# Altium PCB PCB1.PcbDoc
Units mm, origin at the board's own origin, x right, y up, seen from the top; angles counter-clockwise.
Board outline 55.42 x 15.98 mm, 2 copper layers (Top Layer, Bottom Layer), stack 0.6 mm thick; 38 components, 19 nets, 109 pads, 20 vias.
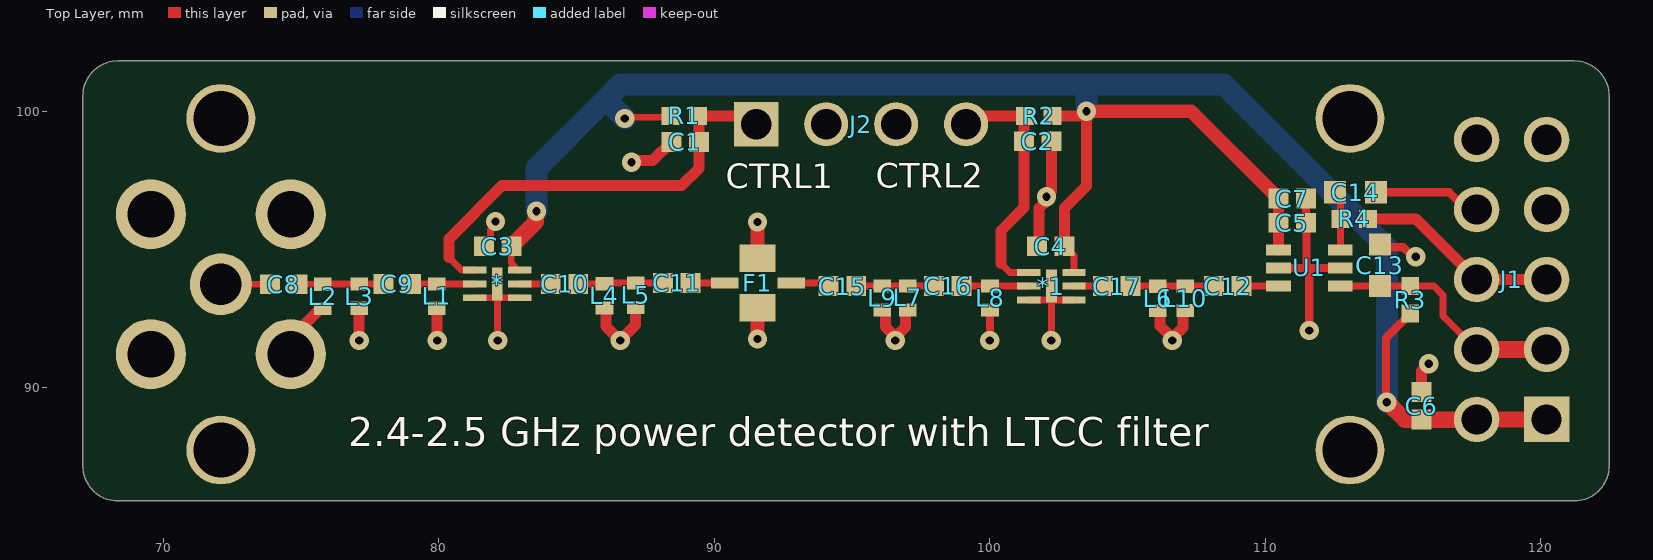
[diagram p0: Top Layer view]
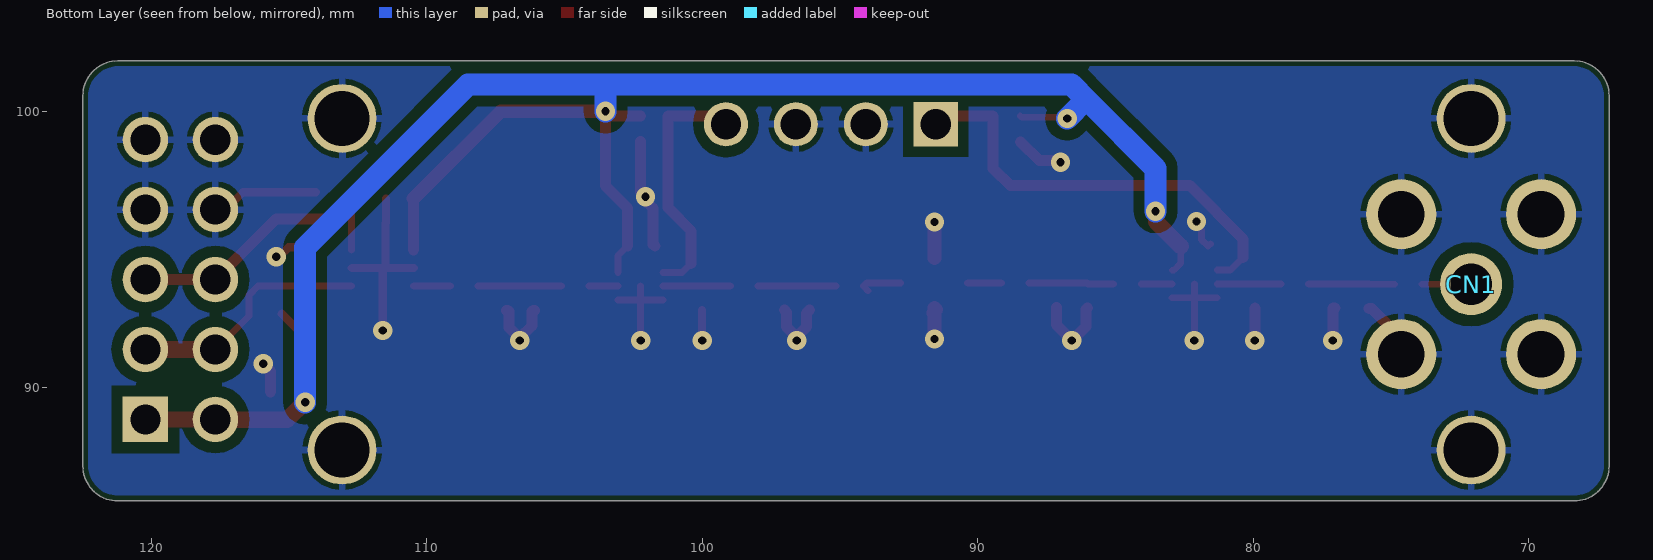
[diagram p1: Bottom Layer view, seen from below]

## Layer stack, top to bottom
Top Solder: solder mask 0.025, SM-001, Dk 4
Top Layer: signal copper 0.035
Dielectric 1: core 0.53, Core-043, Dk 4.3
Bottom Layer: signal copper 0.035
Bottom Solder: solder mask 0.025, SM-001, Dk 4

## Board outline
67.07,87.14 67.07,100.58 cw(c68.34,100.58) 68.34,101.85 121.22,101.85 cw(c121.22,100.58) 122.49,100.58 122.49,87.14 cw(c121.22,87.14) 121.22,85.87 68.34,85.87 cw(c68.34,87.14)

## Design rules (kind name [scope] priority, off if disabled: settings)
BoardOutlineClearance [All] p1: gap=0.2 ignorepadtopadclearanceinfootprint=FALSE
Clearance Clearance_polygon [All vs InPolygon] p1: gap=0.4 ignorepadtopadclearanceinfootprint=FALSE
Clearance [All] p2: gap=0.15 ignorepadtopadclearanceinfootprint=FALSE
HoleSize [All] p1: absolutevalues=TRUE maxlimit=10 minlimit=0.3 maxpercent=80.000 minpercent=20.000
MinimumSolderMaskSliver [All] p1: minsoldermaskwidth=0.08
PasteMaskExpansion [All] p1: expansion=-0.05
PlaneClearance [All] p1: clearance=0.4
PlaneConnect [All] p1: pad.planeconnectstyle=Relief pad.reliefexpansion=0.508 pad.reliefentries=4 pad.reliefconductorwidth=0.254 pad.reliefairgap=0.155 via.planeconnectstyle=Direct via.reliefexpansion=0.508 via.reliefentries=4 via.reliefconductorwidth=0.254 via.reliefairgap=0.254
PolygonConnect [All] p1: thpad.connectstyle=Relief thpad.reliefconductorwidth=0.254 thpad.reliefentries=4 thpad.polygonreliefangle="90 Angle" thpad.airgapwidth=0.2 smdpad.connectstyle=Relief smdpad.reliefconductorwidth=0.254 smdpad.reliefentries=4 smdpad.polygonreliefangle="90 Angle" smdpad.airgapwidth=0.2 via.connectstyle=Direct via.reliefconductorwidth=0.254 via.reliefentries=4 via.polygonreliefangle="90 Angle" via.airgapwidth=0.254
RoutingVias [All] p1: holewidth=0.3 width=0.7 viastyle="Through Hole" minholewidth=0.3 minwidth=0.6 maxholewidth=0.5 maxwidth=2
RoutingVias RoutingVias_Power [InNetClass('Power')] p2: holewidth=0.4 width=0.8 viastyle="Through Hole" minholewidth=0.3 minwidth=0.7 maxholewidth=0.6 maxwidth=1.3
SilkToSilkClearance [All] p1: silktosilkclearance=0.05
SilkToSolderMaskClearance [IsPad] p1: minsilkscreentomaskgap=0.1 clearancetoexposedcopper=TRUE
SolderMaskExpansion [All] p1: expansion=0.05 istentingtop=FALSE
Width Width_Power [InNetClass('Power')] p1: maxlimit=1 minlimit=0.155 preferedwidth=0.4 minimp=50.000000 maximp=50.000000 favimp=50.000000
Width [All] p2: maxlimit=1 minlimit=0.155 preferedwidth=0.2 minimp=50.000000 maximp=50.000000 favimp=50.000000
23 further rules are at their usual default settings.

## Components (designator, comment, footprint, x,y, rotation, side; value= is the part's Value field where it differs from the comment)
* "BGU7224" SON50P160X50_HS-7M 82.12,93.75 r0 top
*1 "BGU7224" SON50P160X50_HS-7M 102.24,93.67 r0 top
C1 "100nF" CAPC0402(1005)60_M 88.94,98.91 r0 top
C2 "100nF" CAPC0402(1005)60_M 101.74,98.93 r180 top
C3 "100nF" CAPC0402(1005)60_M 82.13,95.12 r180 top
C4 "100nF" CAPC0402(1005)60_M 102.22,95.12 r180 top
C5 "100nF" CAPC0402(1005)60_M 110.98,95.97 r0 top
C6 "100nF" CAPC0402(1005)60_M 115.68,89.33 r90 top
C7 "100pF" CAPC0402(1005)60_M 110.98,96.85 r0 top value=100nF
C8 "1.4pF" CAPC0402(1005)60_M 74.36,93.74 r0 top value=100nF
C9 "1.4pF" CAPC0402(1005)60_M 78.49,93.75 r180 top value=100nF
C10 "1.4pF" CAPC0402(1005)60_M 84.56,93.75 r0 top value=100nF
C11 "1.4pF" CAPC0402(1005)60_M 88.63,93.79 r180 top value=100nF
C12 "1.4pF" CAPC0402(1005)60_M 108.64,93.67 r180 top value=100nF
C13 "10nF" WCAP-CSGP_0603_Reflow 114.17,94.43 r270 top
C14 "10nF" WCAP-CSGP_0603_Reflow 113.28,97.08 r180 top
C15 "1.4pF" CAPC0402(1005)60_M 94.65,93.67 r0 top value=100nF
C16 "1.4pF" CAPC0402(1005)60_M 98.47,93.68 r180 top value=100nF
C17 "1.4pF" CAPC0402(1005)60_M 104.61,93.67 r0 top value=100nF
CN1 "60311002114501" 60311002114501 72.08,93.74 r90 bottom
F1 "LBP.2450.X.C.30" LBP.2450.X.C.30 91.57,93.78 r0 top
J1 "61301021121" 61301021121 118.95,93.91 r90 top
J2 "61300411121" 61300411121 95.33,99.55 r0 top
L1 "8.2nH" INDC1006X60X20LL10T10 79.92,93.31 r90 top
L2 "6.6nH" INDC1006X60X20LL10T10 75.78,93.3 r90 top
L3 "6.6nH" INDC1006X60X20LL10T10 77.1,93.31 r90 top
L4 "6.6nH" INDC1006X60X20LL10T10 86.01,93.32 r90 top
L5 "6.6nH" INDC1006X60X20LL10T10 87.14,93.34 r90 top
L6 "6.6nH" INDC1006X60X20LL10T10 106.1,93.23 r90 top
L7 "6.6nH" INDC1006X60X20LL10T10 97.02,93.24 r90 top
L8 "8.2nH" INDC1006X60X20LL10T10 100.01,93.24 r90 top
L9 "6.6nH" INDC1006X60X20LL10T10 96.1,93.24 r90 top
L10 "6.6nH" INDC1006X60X20LL10T10 107.1,93.23 r90 top
R1 "4k7" RESC1005X40X25ML05T05 88.905,99.85 r180 top
R2 "4k7" RESC1005X40X25ML05T05 101.775,99.85 r0 top
R3 "2k2" RESC1005X40X25ML05T05 115.27,93.17 r270 top
R4 "100R" RESC1005X40X25ML05T05 113.23,96.11 r180 top
U1 "LTC5508" SOT65P210X100-6N 111.605,94.33 r180 top

## Footprints (in the part's own frame and the unit in brackets; to place one, negate y for a bottom-side part, rotate by r counter-clockwise, add the part's x,y. Pads: shape width x height; smd on the part's side, far side on the other; paste and mask are expansions set on the pad)
61300411121 [mm] "Pin Header, pitch 2.54 mm, THT, Vertical, single row, 4p"
  rect 1.6x1.6 hole 1.1: 1(-3.81,0)
  round 1.6 hole 1.1: 2(-1.27,0) 3(1.27,0) 4(3.81,0)
  body extent -5.08,-1.27 5.08,1.27, height 8.57
61301021121 [mm] "Pin Header, pitch 2.54 mm, THT, Vertical, dual row, 10p"
  rect 1.65x1.65 hole 1.1: 1(-5.08,-1.27)
  round 1.65 hole 1.1: 2(-5.08,1.27) 3(-2.54,-1.27) 4(-2.54,1.27) 5(0,-1.27) 6(0,1.27) 7(2.54,-1.27) 8(2.54,1.27) 9(5.08,-1.27) 10(5.08,1.27)
  body extent -6.35,-2.54 6.35,2.54, height 8.59
60311002114501 [mm] "SMA PCB THT Jack Right Angle"
  round 2.25 hole 1.5: 1(0,0)
  round 2.55 hole 1.7: 2(-2.54,2.54) 3(2.54,2.54) 4(2.54,-2.54) 5(-2.54,-2.54)
  body extent -3.5,-11.5 3.5,3.5, height 9.66
CAPC0402(1005)60_M [mm] "Chip Capacitor, Body 1.0x0.5mm, Height 0.6mm, IPC Low Density"
  rect 0.72x0.72 smd: 1(-0.5,0) 2(0.5,0)
  body extent -0.55,-0.3 0.55,0.3, height 0.6
INDC1006X60X20LL10T10 [mm] "Chip Inductor, 2-Leads, Body 1.1x0.7mm, IPC High Density"
  rect 0.48x0.64 smd: 1(-0.44,0) 2(0.44,0)
  body extent -0.55,-0.35 0.55,0.35, height 0.6
LBP.2450.X.C.30 [mm]
  rect 1.3x1 smd: 1(0,0.9) 4(0,-0.9)
  rect 1x0.4 smd mask+0.06: 2(-1.2,0) 3(1.22,0)
  body extent -1.01,-0.63 1.01,0.63, height 0.25
RESC1005X40X25ML05T05 [mm] "Chip Resistor, 2-Leads, Body 1.00x0.50mm, IPC Low Density"
  rect 0.65x0.65 smd: 1(-0.5,0) 2(0.5,0)
  body extent -0.53,-0.27 0.53,0.28, height 0.4
SON50P160X50_HS-7M [mm] "SON, 6-Leads, Body 1,60x1,60mm, Pitch 0,50mm, Thermal Pad 1,20x0,39mm, IPC Low Density"
  rect 0.85x0.25 smd: 1(-0.82,0.5) 2(-0.82,0) 3(-0.82,-0.5) 4(0.82,-0.5) 5(0.82,0) 6(0.82,0.5)
  rect 0.39x1.2 smd: 7(0,0)
  body extent -0.85,-0.85 0.85,0.85, height 0.5
SOT65P210X100-6N [mm] "SOT23, 6-Leads, Body 2,00x2,10mm, Pitch 0,65mm, IPC Medium Density"
  rect 0.9x0.4 smd: 1(-1.125,0.65) 2(-1.125,0) 3(-1.125,-0.65) 4(1.125,-0.65) 5(1.125,0) 6(1.125,0.65)
  body extent -1.3,-1.1 1.3,1.1, height 1
WCAP-CSGP_0603_Reflow [mm] "Ceramic Capacitors, body 1.6x0.8mm"
  rect 0.8x0.8 smd: 1(-0.75,0) 2(0.75,0)
  body extent -0.8,-0.4 0.8,0.4, height 0.8

## Part data
C1 C2 C3 C4 C5 C6 C7 C8 C9 C10 C11 C12 C15 C16 C17: library part CMP-1034-02078-1, "CAP 100nF 50V ±20% 0402 (1005 Metric) Thickness 0.6mm SMD", Case-EIA=0402, Case-Metric=1005, Rated Voltage="50 V", Tolerance=Â±20%, Max Thickness="0.6 mm", Technology=SMT
C13 C14: library part 885012206020, "WCAP-CSGP General Purpose Ceramic Capacitors, size 0603, 100nF, +/-10%, 10VDC", Capacitance=100nF, Capacitance Tolerance=+/-10%, Isolation Resistance=>=5GOhm, Operating Temperature="-55 to +125degC", Rated Voltage=10VDC, Ceramic Type=X7R, ComponentLink1Description=Manufacturer, ComponentLink1URL=http://www.we-online.de, ComponentLink2Description=Datasheet, ComponentLink2URL=https://katalog.we-online.com/pbs/datasheet/885012206020.pdf, Dissipation Factor=#NAME?, Height="0.8mm +/-0.07mm", Mounting Technology=SMD, Packaging="Tape and Reel", Part Number=885012206020, Published Date="August 2019", Publisher="Wurth Elektronik", Size=0603, Technical Reference=X7R0603104K010DFCT10000
CN1: "WR-SMA PCB Jack, THT, Right Angle", Frequency Range=DC~18GHz, Operating Temperature="-65 to +165degC", Center Contact Diameter=1.27mm, ComponentLink1Description=Manufacturer, ComponentLink1URL=http://www.we-online.de, ComponentLink2Description=Datasheet, ComponentLink2URL=https://katalog.we-online.com/em/datasheet/60311002114501.pdf, Connector Type=SMA, Gender=Jack, Impedance=50Ohm, Interface=MIL-STD-348, Mounting Technology=THT, Orientation Type="Right Angle", Packaging=Tray, Part Number=60311002114501, Published Date="May 2019", Publisher="Wurth Elektronik"
J1: "WR-PHD Pin Header, THT, pitch 2.54mm, Dual Row, Vertical, 10pin", Contact Resistance=20mOhm, Operating Temperature="-40 to +105degC", Rated Current=3A, Withstanding Voltage=500VAC, Working Voltage=250VAC, ComponentLink1Description=Manufacturer, ComponentLink1URL=http://www.we-online.de, ComponentLink2Description=Datasheet, ComponentLink2URL=https://katalog.we-online.de/em/datasheet/6130xx21121.pdf, Gender=Male, Mounting Technology=THT, Orientation=Vertical, Packaging=Bag, Part Number=61301021121, Pin Number=10, Pitch=2.54mm, Published Date="June 2019", Publisher="Wurth Elektronik", Row Number=Dual
J2: "WR-PHD Pin Header, THT, pitch 2.54mm, Single Row, Vertical, 4pin", Contact Resistance=20mOhm, Operating Temperature="-40 to +105degC", Rated Current=3A, Withstanding Voltage=500VAC, Working Voltage=250VAC, ComponentLink1Description=Manufacturer, ComponentLink1URL=http://www.we-online.de, ComponentLink2Description=Datasheet, ComponentLink2URL=https://katalog.we-online.de/em/datasheet/6130xx11121.pdf, Gender=Male, Mounting Technology=THT, Orientation=Vertical, Packaging=Bag, Part Number=61300411121, Pin Number=4, Pitch=2.54mm, Published Date="June 2019", Publisher="Wurth Elektronik", Row Number=Single
L1 L8: library part CMP-2000-06594-1, "Chip Inductor, 8.2 nH, +/- 5%, 500 mA, -55 to 125 degC, 0402 (1005 Metric), RoHS, Tape and Reel", Case Size/Dimension=0402, DC Resistance=0.17O, Inductance-Nom=10nH, Manufacturer=Murata, Package Description="2-Pin Surface Mount Device, Body 1 x 0.6 mm", Rated Current-Max=500mA, Tolerance (%)=±5%, Datasheet URL=http://search.murata.co.jp/Ceramy/image/img/PDF/ENG/L0075S0080LQW15A_00.pdf, Datasheet Version=09/2012, Manufacturer URL=http://www.murata.com/, Mounting Technology=SurfaceMount, Package Reference=0402, Type=Molded
L2 L3 L4 L5 L6 L7 L9 L10: library part CMP-2000-06594-1, "Chip Inductor, 6.6 nH, +/- 5%, 500 mA, -55 to 125 degC, 0402 (1005 Metric), RoHS, Tape and Reel", Case Size/Dimension=0402, DC Resistance=0.17O, Inductance-Nom=10nH, Manufacturer=Murata, Package Description="2-Pin Surface Mount Device, Body 1 x 0.6 mm", Rated Current-Max=500mA, Tolerance (%)=±5%, Datasheet URL=http://search.murata.co.jp/Ceramy/image/img/PDF/ENG/L0075S0080LQW15A_00.pdf, Datasheet Version=09/2012, Manufacturer URL=http://www.murata.com/, Mounting Technology=SurfaceMount, Package Reference=0402, Type=Molded
R1 R2 R3 R4: library part CMP-2002-08452-1, Manufacturer="Vishay Dale", Part Number=CRCW04022K20FKED

## Free pads (board coordinates)
  round 2.5 hole 2: 1(72.08,87.72) 1(72.08,99.76) 1(113.08,87.72) 1(113.08,99.76)

## Via types
v1: diameter 0.7, hole 0.3, Top Layer to Bottom Layer, 20 vias

## Nets (pads, with @x,y where several pads share a name; then routed paths per layer and width w, separated by ;. In a path a pad name is that pad's centre, name@x,y a point inside that pad or via, vN(x,y) a via of type N, cw(c..) or ccw(c..) an arc to the next point about the centre after c; other vN are vias at no path point)
CTRL1: *.1 C1.2 J2.1 R1.1 | length 15.9
  Top Layer w0.25: 80.36,94.71 80.82,94.25 *.1 ; C1.2 C1.2@89.445,98.915 ; R1.1@89.445,99.845 R1.1@89.45,99.85
  Top Layer w0.4: 80.36,94.71 80.36,95.39 82.29,97.32 88.81,97.32 89.44,97.95 C1.2 ; C1.2@89.445,98.915 R1.1@89.445,99.845 ; R1.1@89.45,99.85 J2.1@91.54,99.85
CTRL2: *1.1 C2.2 J2.4 R2.1 | length 8.9
  Top Layer w0.25: 100.4,94.5 100.73,94.17 *1.1
  Top Layer w0.4: J2.4@99.16,99.85 101.24,99.85 C2.2 101.24,96.52 100.4,95.68 100.4,94.5
FILTR_OUT: C15.1 F1.3 | length 1.6
  Top Layer w0.25: F1.3 94.04,93.78 C15.1 C15.1@93.982,93.503
GND: *1.3 *1.4 *1.7 *.3 *.4 *.7 C1.1 C2.1 C3.2 C4.2 C5.2 C6.2 C7.2 C13.1 C14.1 CN1.2 CN1.3 CN1.4 CN1.5 F1.1 F1.4 J1.7 J1.8 J1.9 J1.10 J2.2 J2.3 L1.1 L2.1 L3.1 L4.1 L5.1 L6.1 L7.1 L8.1 L9.1 L10.1 pad.1 U1.2 U1.5 | length 44.4
  Top Layer w0.25: *.3 *.7@82.025,93.25 ; C3.2@81.55,95.2 C3.2 81.865,95.355 81.865,95.713 82.05,95.898 v1(82.05,96.02) ; *.7@82.12,93.345 *.7 82.125,93.745 *.7@82.125,93.34 ; 82.13,92.06 82.125,92.065 *.7@82.125,93.34 ; *.4 82.215,93.25 *.7@82.125,93.34 ; *1.3 102.145,93.17 *1.7@102.24,93.265 ; v1@102.23,92.025 102.24,92.035 *1.7@102.24,93.265 ; *1.7 *1.7@102.24,93.265 ; *1.4 102.36,93.17 102.335,93.195 102.31,93.195 *1.7@102.24,93.265
  Top Layer w0.3: v1@100,91.84 100.005,91.845 100.005,92.795 L8.1 ; U1.5 111.5,94.33 ; C7.2 C5.2 111.5,95.95 111.5,94.33 ; v1@111.6,91.96 111.6,94.23 111.5,94.33 ; U1.2 111.5,94.33 ; C14.1 116.685,97.08 117.315,96.45 J1.8 ; C13.1 114.268,95.082 115.02,95.082 115.362,94.74 v1(115.47,94.74)
  Top Layer w0.4: CN1.2@75.43,91.285 74.705,91.285 CN1.2 74.62,91.78 75.7,92.86 L2.1 ; L3.1@77.02,92.87 L3.1 77.105,92.865 77.105,91.705 v1(77.11,91.7) ; L1.1 79.93,92.86 79.93,92.03 79.92,92.02 79.92,91.72 v1(79.94,91.7) ; L4.1 86.067,92.823 86.067,92.213 v1(86.58,91.7) 87.14,92.26 L5.1 ; v1(86.99,98.17) 87.047,98.227 87.757,98.227 C1.1 ; L9.1 96.207,92.693 96.207,92.185 96.57,91.822 96.933,92.185 96.933,92.713 L7.1 ; C4.2 101.79,95.19 101.79,96.499 102.06,96.769 v1(102.06,96.92) 102.24,97.1 C2.1 ; L6.1 106.14,92.79 106.18,92.75 106.18,92.231 106.63,91.781 107.02,92.171 107.02,92.75 107.06,92.79 L10.1 ; C6.2 115.68,90.59 v1(115.94,90.85)
  Top Layer w0.5: v1(91.57,91.75) 91.57,92.66 91.61,92.7 91.5,92.81 F1.4 ; F1.1 v1(91.57,96)
  other v1: 82.13,91.7 96.57,91.7 100,91.7 102.23,91.7 106.63,91.7 111.6,92.06
Net*1_2: *1.2 C16.1 L8.2 | length 2.5
  Top Layer w0.25: C16.1 L8.2 100.02,93.67 *1.2
Net*1_5: *1.5 C17.1 | length 1.1
  Top Layer w0.254: *1.5 C17.1
Net*_2: *.2 C9.1 L1.2 | length 2.3
  Top Layer w0.25: C9.1 L1.2 *.2
Net*_5: *.5 C10.1 | length 1.1
  Top Layer w0.25: *.5 C10.1
NetC8_1: C8.1 CN1.1 | length 1.8
  Top Layer w0.25: CN1.1 C8.1
NetC8_2: C8.2 C9.2 L2.2 L3.2 | length 3.1
  Top Layer w0.25: C8.2 L2.2 75.785,93.745 77.095,93.745 L3.2 C9.2
NetC10_2: C10.2 C11.2 L4.2 L5.2 | length 3.1
  Top Layer w0.25: C10.2 85.065,93.755 86.005,93.755 L4.2 86.03,93.78 L5.2 87.145,93.785 88.125,93.785 C11.2
NetC11_1: C11.1 F1.2 | length 1.2
  Top Layer w0.25: C11.1 89.135,93.785 90.365,93.785 F1.2
NetC12_1: C12.1 U1.6 | length 1.3
  Top Layer w0.25: C12.1 109.145,93.675 110.475,93.675 U1.6
NetC12_2: C12.2 C17.2 L6.2 L10.2 | length 3
  Top Layer w0.25: C17.2 L6.2 L10.2 C12.2
NetC14_2: C14.2 R4.2 U1.3 | length 2.2
  Top Layer w0.254: C14.2 112.73,96.88 R4.2 U1.3
NetC15_2: C15.2 C16.2 L7.2 L9.2 | length 2.8
  Top Layer w0.25: C15.2 95.155,93.675 96.095,93.675 L9.2 L7.2 C16.2
S\H\D\N\: C13.2 J1.3 J1.4 R3.1 U1.1 | length 8.9
  Top Layer w0.254: U1.1 C13.2 114.18,93.67 R3.1 116.13,93.67 116.46,93.34 116.46,92.59 J1.4
  Top Layer w0.6: J1.4 J1.3
VCC: *1.6 *.6 C3.1 C4.1 C5.1 C6.1 C7.1 J1.1 J1.2 R1.2 R2.2 R3.2 U1.4 | length 75.6
  Top Layer w0.24: C3.1 82.63,94.495 82.875,94.25 *.6 ; v1(86.75,99.76) 86.795,99.805 88.405,99.805 R1.2@88.45,99.85
  Top Layer w0.25: C4.1@102.71,95.13 C4.1 103.06,94.78 *1.6
  Top Layer w0.3: v1@114.447,89.45 114.39,89.507 114.39,91.79 R3.2
  Top Layer w0.4: R2.2@102.24,99.85 103.259,99.85 103.429,100.02 v1(103.51,100.02) 103.51,99.85 103.51,97.31 102.71,96.51 C4.1@102.71,95.13 ; U1.4 C5.1 C7.1
  Top Layer w0.5: v1(103.51,100.02) 107.31,100.02 C7.1
  Top Layer w0.6: C3.1 83.521,96.011 83.521,96.371 v1(83.54,96.39) ; v1@114.447,89.45 115.077,88.82 117.65,88.82 117.68,88.82 J1.1
  Bottom Layer w0.8: v1(83.54,96.39) 83.54,97.94 85.985,100.385 ; v1(86.75,99.76) 86.125,100.385 85.985,100.385 ; v1(103.51,100.02) 103.51,100.99 ; v1(114.42,89.45) 114.42,95.07 108.5,100.99 103.51,100.99 ; 85.985,100.385 86.59,100.99 103.51,100.99
VOUT: J1.5 J1.6 R4.1 | length 7.4
  Top Layer w0.4: R4.1 115.48,96.11 J1.6 J1.5

## Polygon pours and split planes (outlines as drawn)
GND on Bottom Layer "BOTGND" (solid, pour order 19): 67.07,87.14 67.07,100.58 cw(c68.34,100.58) 68.34,101.85 121.22,101.85 cw(c121.22,100.58) 122.49,100.58 122.49,87.14 cw(c121.22,87.14) 121.22,85.87 68.34,85.87 cw(c68.34,87.14)

## Silkscreen, mask and mechanical layers (free items; w line width, h text height)
Top Overlay:
  text "CTRL2" at 95.86,96.952 h1.52
  text "CTRL1" at 90.42,96.936 h1.52
  text "2.4-2.5 GHz power detector with LTCC filter" at 76.7,87.51 h1.8
Mechanical 1:
  lines w0.1: 67.07,87.14 ccw(c68.34,87.14) 68.34,85.87 121.22,85.87 ccw(c121.22,87.14) 122.49,87.14 122.49,100.58 ccw(c121.22,100.58) 121.22,101.85 94.01,101.85 68.34,101.85 ccw(c68.34,100.58) 67.07,100.58 67.07,87.14